# Altium PCB Carte_alim.PCBDOC
Units mm, origin at the board's own origin, x right, y up, seen from the top; angles counter-clockwise.
Board outline 299.72 x 199.9 mm, 2 copper layers (Top Layer, Bottom Layer); 50 components, 15 nets, 112 pads, 0 vias.
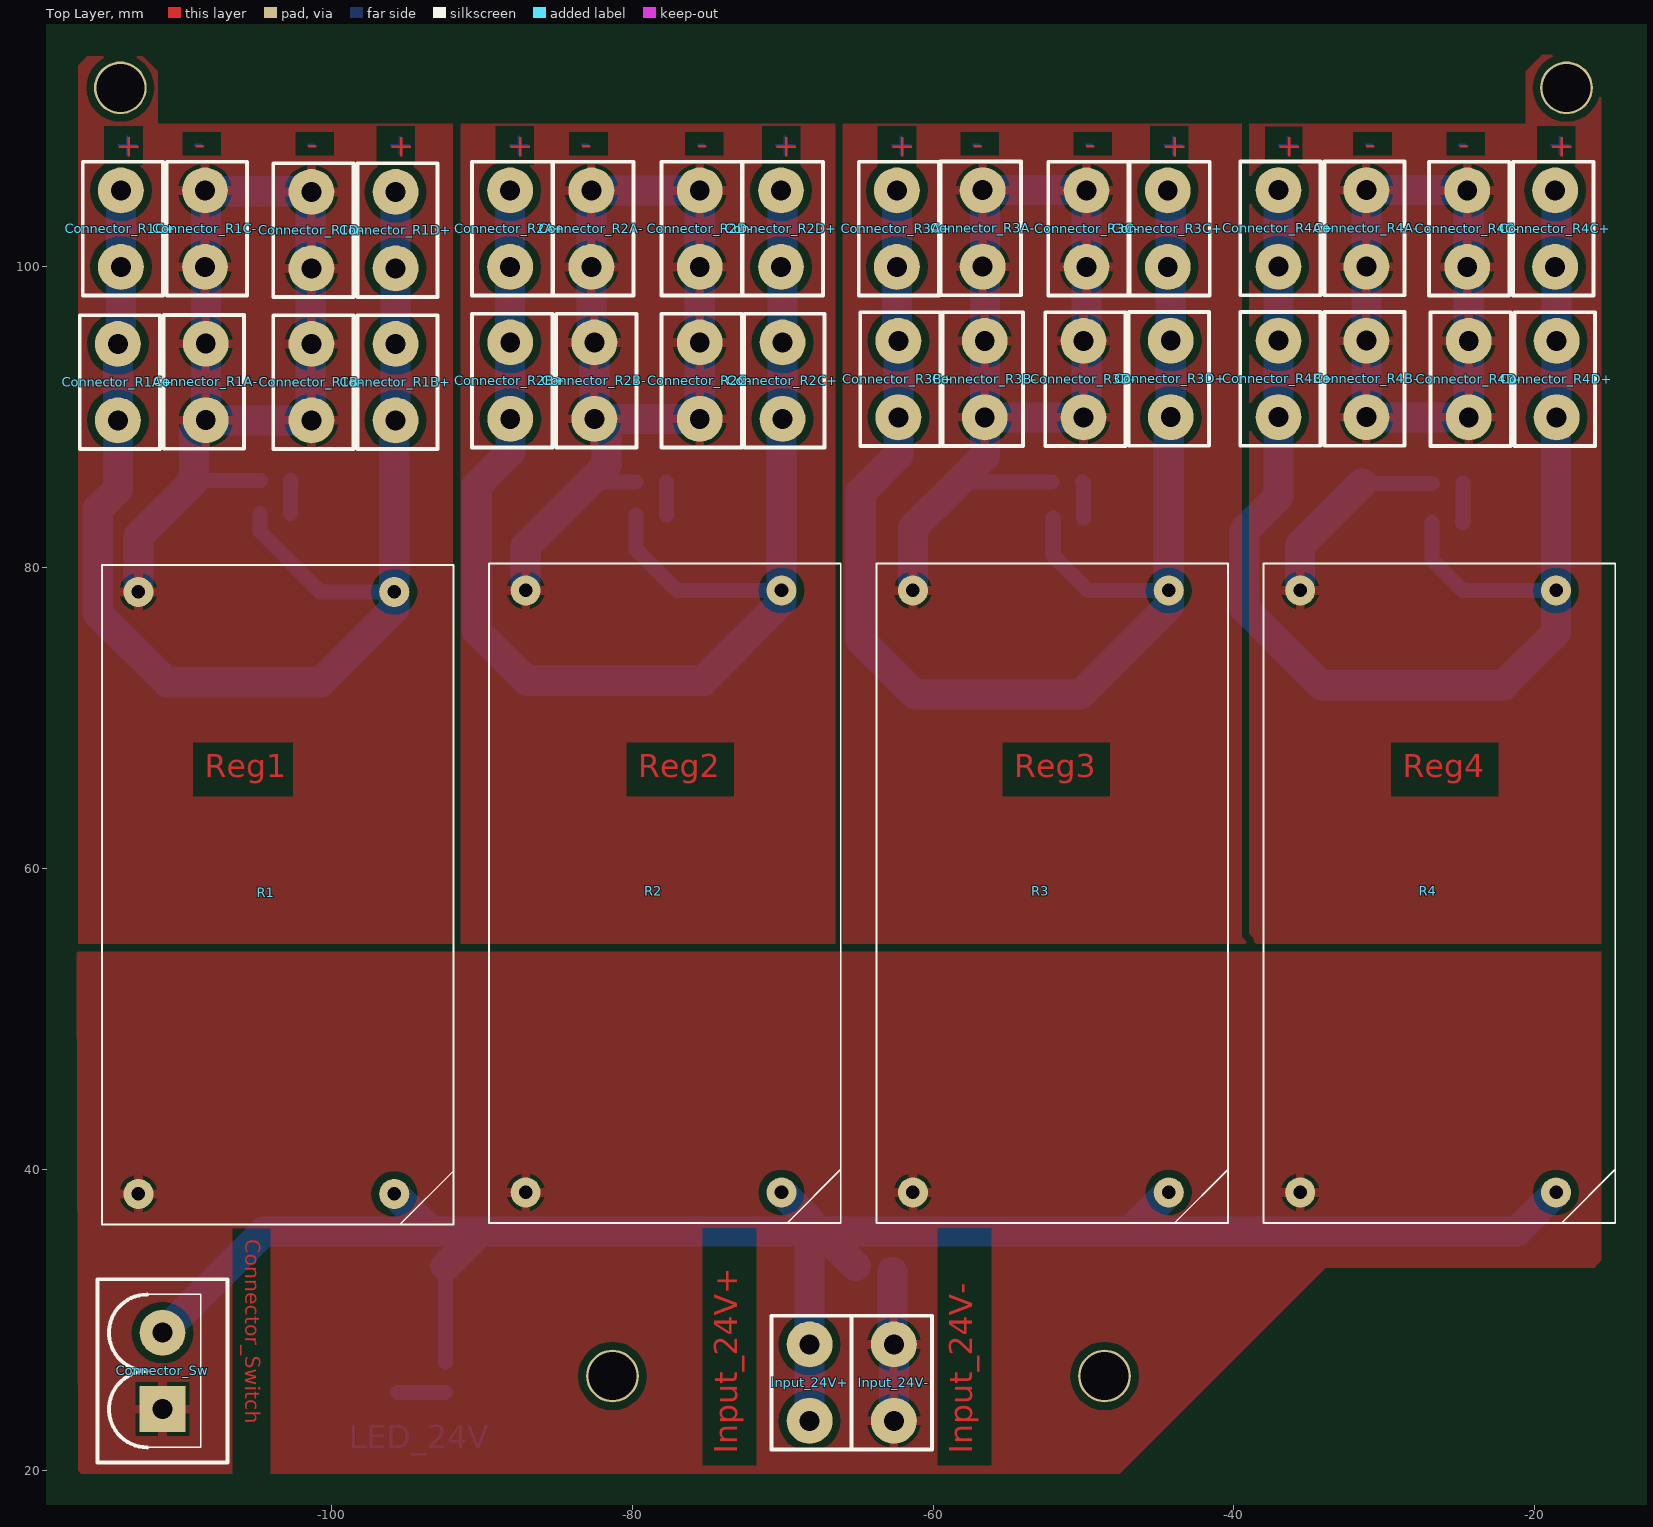
[diagram p0: Top Layer view]
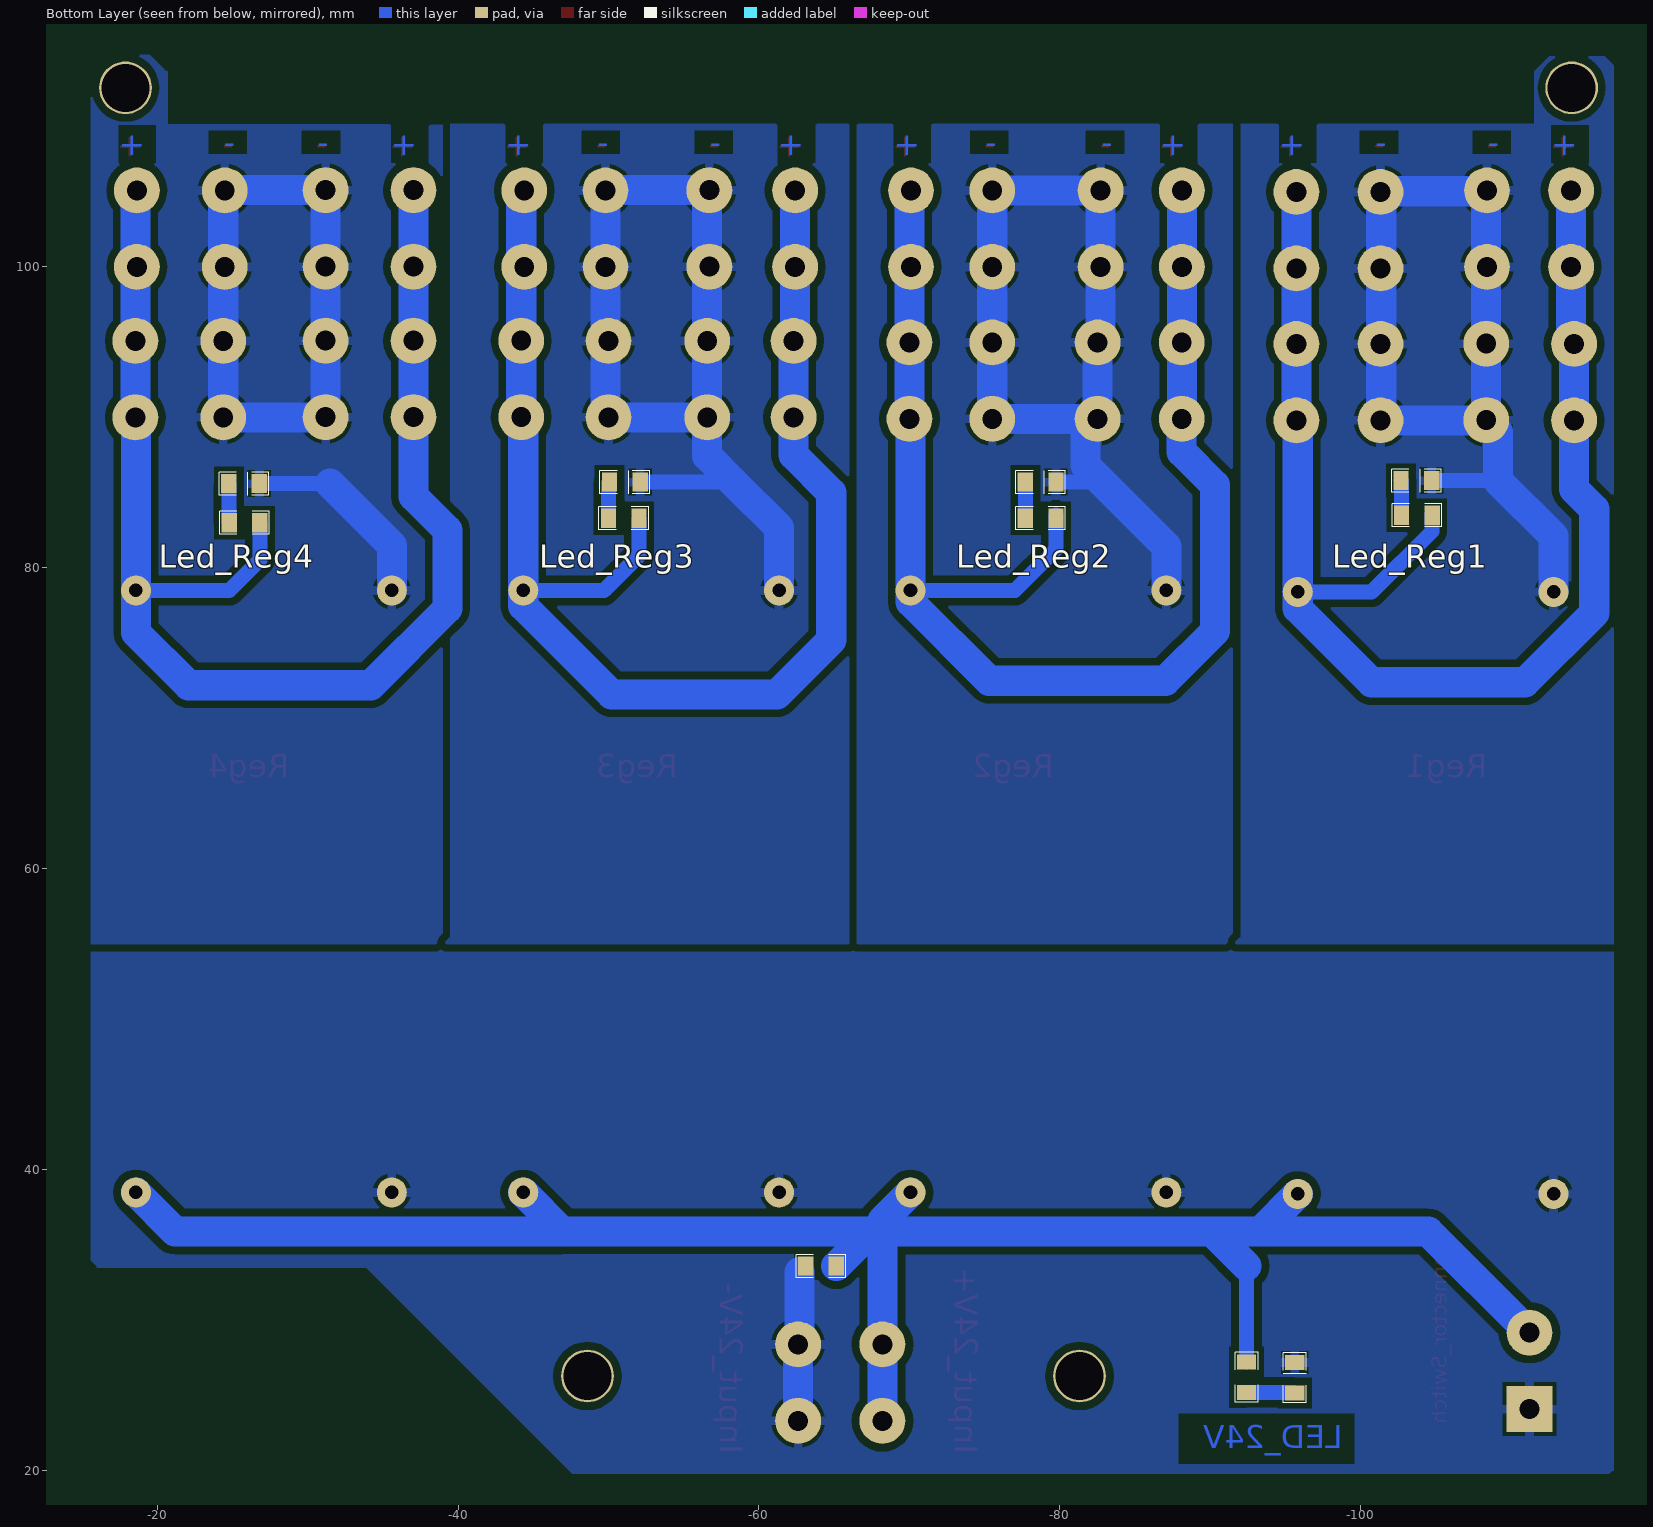
[diagram p1: Bottom Layer view, seen from below]

## Layer stack, top to bottom
Top Solder: solder mask 0.0102, Solder Resist, Dk 3.5
Top Layer: signal copper 0.0356
Dielectric1: dielectric 0.32, FR-4, Dk 4.8
Bottom Layer: signal copper 0.0356
Bottom Solder: solder mask 0.0102, Solder Resist, Dk 3.5

## Board outline
-141.655,-46.39 158.065,-46.39 158.065,153.508 -141.655,153.508

## Design rules (kind name [scope] priority, off if disabled: settings)
Clearance Clearance_bottom_polygon [OnLayer('Bottom Layer') Or OnLayer('Multi-Layer') vs OnLayer('Bottom Layer')  And  InPoly] p1: gap=0.508
Clearance Clearance_top_polygon [OnLayer('Top Layer')  Or OnLayer('Multi-Layer') vs OnLayer('Top Layer') And InPoly] p2: gap=0.508
Clearance Clearance_bottom [OnLayer('Bottom Layer') Or OnLayer('Multi-Layer') vs OnLayer('Bottom Layer')  And Not InPoly] p3: gap=0.203
Clearance Clearance_top [OnLayer('Top Layer')  Or OnLayer('Multi-Layer') vs OnLayer('Top Layer') And Not InPoly] p4: gap=0.203
Clearance Clearance_pad_to_pad [OnLayer('Multi-Layer') vs OnLayer('Multi-Layer')] p5: gap=0.254
ComponentClearance ComponentClearance_bottom [OnLayer('Bottom Overlay') vs OnLayer('Bottom Overlay')] p1: gap=0 collisioncheckmode=3 verticalgap=0.254 showdistances=FALSE
ComponentClearance ComponentClearance_top [OnLayer('Top Overlay') vs OnLayer('Top Overlay')] p2: gap=0 collisioncheckmode=3 verticalgap=0.254 showdistances=FALSE
FabricationTestPointUsage TestPointUsage [All] p1: valid=0 allowmultiple=FALSE
FabricationTestpoint Testpoint [All] p1: side=3 testpointundercomponent=TRUE minsize=1.016 maxsize=2.54 preferedsize=1.524 minholesize=0 maxholesize=1.016 preferedholesize=0.813 testpointgrid=0.025 allowsidetop=TRUE allowsidebottom=TRUE usegrid=TRUE gridtolerance=0
HoleSize [All] p1: absolutevalues=TRUE maxlimit=25.4 minlimit=0.406 maxpercent=80.000 minpercent=20.000
MinimumAnnularRing [PadXSize_AllLayers = PadYSize_AllLayers] p1: minimumring=0.254
PermittedLayers [All] p1: toplayerpermitted=TRUE bottomlayerpermitted=TRUE
PolygonConnect [All] p1: connectstyle=Relief reliefconductorwidth=0.61 reliefentries=4 polygonreliefangle="90 Angle" airgapwidth=0.254
RoutingVias [All] p1: holewidth=0.406 width=0.813 viastyle="Through Hole" minholewidth=0.4 minwidth=0.8 maxholewidth=0.6 maxwidth=10
SMDToPlane [All] p1: distance=0
SolderMaskExpansion [All] p1: expansion=0.102
ViasUnderSMD [All] p1: allowed=FALSE
Width Width_botom_top [OnLayer('Bottom Layer') or OnLayer('Top Layer')] p1: maxlimit=254 minlimit=0.254 preferedwidth=0.813 minimp=50.000000 maximp=50.000000 favimp=50.000000
26 further rules are at their usual default settings.

## Classes and differential pairs
component class Carte_alim: R1 R2 R5

## Components (designator, comment, footprint, x,y, rotation, side; value= is the part's Value field where it differs from the comment)
Connector_R1A+ "Connector_Cosse" Connector_Cosse -114.164,89.8 r180 top
Connector_R1A- "Connector_Cosse" Connector_Cosse -108.322,94.9 r0 top
Connector_R1B+ "Connector_Cosse" Connector_Cosse -95.712,89.8 r180 top
Connector_R1B- "Connector_Cosse" Connector_Cosse -101.3,89.8 r180 top
Connector_R1C+ "Connector_Cosse" Connector_Cosse -113.964,100 r180 top
Connector_R1C- "Connector_Cosse" Connector_Cosse -108.376,100 r180 top
Connector_R1D+ "Connector_Cosse" Connector_Cosse -95.712,99.9 r180 top
Connector_R1D- "Connector_Cosse" Connector_Cosse -101.3,99.9 r180 top
Connector_R2A+ "Connector_Cosse" Connector_Cosse -88.1,100 r180 top
Connector_R2A- "Connector_Cosse" Connector_Cosse -82.7,100 r180 top
Connector_R2B+ "Connector_Cosse" Connector_Cosse -88.088,89.9 r180 top
Connector_R2B- "Connector_Cosse" Connector_Cosse -82.5,89.9 r180 top
Connector_R2C+ "Connector_Cosse" Connector_Cosse -70,89.9 r180 top
Connector_R2C- "Connector_Cosse" Connector_Cosse -75.5,89.9 r180 top
Connector_R2D+ "Connector_Cosse" Connector_Cosse -70.1,100 r180 top
Connector_R2D- "Connector_Cosse" Connector_Cosse -75.5,100 r180 top
Connector_R3A+ "Connector_Cosse" Connector_Cosse -62.4,100 r180 top
Connector_R3A- "Connector_Cosse" Connector_Cosse -56.7,105.1 r0 top
Connector_R3B+ "Connector_Cosse" Connector_Cosse -62.3,90 r180 top
Connector_R3B- "Connector_Cosse" Connector_Cosse -56.558,95.08 r0 top
Connector_R3C+ "Connector_Cosse" Connector_Cosse -44.4,100 r180 top
Connector_R3C- "Connector_Cosse" Connector_Cosse -49.8,100 r180 top
Connector_R3D+ "Connector_Cosse" Connector_Cosse -44.2,95.1 r0 top
Connector_R3D- "Connector_Cosse" Connector_Cosse -50,90 r180 top
Connector_R4A+ "Connector_Cosse" Connector_Cosse -37.042,100.02 r180 top
Connector_R4A- "Connector_Cosse" Connector_Cosse -31.2,105.1 r0 top
Connector_R4B+ "Connector_Cosse" Connector_Cosse -37.042,90.02 r180 top
Connector_R4B- "Connector_Cosse" Connector_Cosse -31.2,95.1 r0 top
Connector_R4C+ "Connector_Cosse" Connector_Cosse -18.658,105.08 r0 top
Connector_R4C- "Connector_Cosse" Connector_Cosse -24.5,100 r180 top
Connector_R4D+ "Connector_Cosse" Connector_Cosse -18.558,95.08 r0 top
Connector_R4D- "Connector_Cosse" Connector_Cosse -24.4,90 r180 top
Connector_Sw "comment" AMP_2 -111.2,24.1 r90 top
Decouplage_input_reg "CAP" 0805 -63.1,33.6 r180 bottom
Input_24V+ "Connector_Cosse" Connector_Cosse -68.2,23.32 r180 top
Input_24V- "Connector_Cosse" Connector_Cosse -62.6,28.4 r0 top
LED_REG1 "comment" LED0805 -104.7,85.8 r0 bottom
LED_REG2 "comment" LED0805 -79.732,85.7 r0 bottom
LED_REG3 "comment" LED0805 -52.1,85.7 r0 bottom
LED_REG4 "comment" LED0805 -26.8,85.6 r0 bottom
LED_V24 "Bleue" LED0805 -95.6,27.2 r270 bottom
R1 "Régulateur" Régulateur -95.8,38.4 r180 top
R2 "Régulateur" Régulateur -70.067,38.5 r180 top
R3 "Régulateur" Régulateur -44.333,38.5 r180 top
R4 "Régulateur" Régulateur -18.6,38.5 r180 top
RES_24V "" 0805 -92.4,25.2 r90 bottom
RES_REG1 "RES" 0805 -102.7,83.5 r180 bottom
RES_REG2 "RES" 0805 -77.7,83.3 r180 bottom
RES_REG3 "RES" 0805 -50,83.3 r180 bottom
RES_REG4 "RES" 0805 -24.8,83 r180 bottom

## Footprints (in the part's own frame and the unit in brackets; to place one, negate y for a bottom-side part, rotate by r counter-clockwise, add the part's x,y. Pads: shape width x height; smd on the part's side, far side on the other; paste and mask are expansions set on the pad)
0805 [mil]
  rect 40x50 smd: 1(0,0) 2(80,0)
  silkscreen extent -25,-30 105,30
AMP_2 [mil]
  rect 120x120 hole 52: 1(0,0)
  round 120 hole 52: 2(200,0)
  silkscreen extent -140,-170 340,170
Connector_Cosse [mil]
  round 120 hole 52.01: 1(0,0) 1(0,-200)
  silkscreen extent -110,-275 100,75
LED0805 [mil]
  rect 40x50 smd: A(80,0) K(0,0)
  silkscreen extent -25,-30 105,30
Régulateur [mm]
  round 2 hole 0.9: 1(0,0) 2(17,0) 3(17,-40) 4(0,-40)
  silkscreen extent -3.94,-41.78 19.43,2.03

## Part data
Connector_Sw: library part POWER2, "connecteur alim 2 pôles"
Decouplage_input_reg: "capacité non polarisée"
LED_REG1 LED_REG2 LED_REG3 LED_REG4 LED_V24: library part LED, "LED 5mm/3mm/CMS"
R1 R2 R3 R4: "Régulateur de tension"
RES_24V: library part RES, "resistance"
RES_REG1 RES_REG2 RES_REG3 RES_REG4: "resistance"

## Free pads (board coordinates)
  round 3.5 hole 3.2: 0(-114,111.9) 0(-81.3,26.3) 0(-48.6,26.3) 0(-17.9,111.9)

## Nets (pads, with @x,y where several pads share a name; then routed paths per layer and width w, separated by ;. In a path a pad name is that pad's centre, name@x,y a point inside that pad or via, vN(x,y) a via of type N, cw(c..) or ccw(c..) an arc to the next point about the centre after c; other vN are vias at no path point)
24V+: Connector_Sw.2 Decouplage_input_reg.2 Input_24V+.1 R1.1 R2.1 R3.1 R4.1 RES_24V.2 | length 132.5
  Bottom Layer w1: RES_24V.2 -92.4,33.6
  Bottom Layer w2: Connector_Sw.2 -104.48,35.9 -93.3,35.9 ; R1.1 -93.3,35.9 ; -92.4,33.6 -90.1,35.9 ; R2.1 -68.2,36.633 -68.2,35.9 ; Input_24V+.1@-68.2,23.32 -68.2,28.4 -68.2,35.9 ; Decouplage_input_reg.2 -67.432,35.9 ; R3.1 -46.933,35.9 ; R4.1 -21.2,35.9 -46.933,35.9 ; -93.3,35.9 -90.1,35.9 ; -90.1,35.9 -68.2,35.9 ; -68.2,35.9 -67.432,35.9 ; -67.432,35.9 -46.933,35.9
24V-: Connector_Sw.1 Decouplage_input_reg.1 Input_24V-.1 LED_V24.K R1.2 R2.2 R3.2 R4.2 | length 10.5
  Bottom Layer w1: Decouplage_input_reg.1 Decouplage_input_reg.1@-62.7,33.2
  Bottom Layer w2: Decouplage_input_reg.1@-62.7,33.2 -62.7,28.5 -62.6,28.4 Input_24V-.1@-62.6,23.32
NetLED_REG1_A: LED_REG1.A RES_REG1.1 | length 2.2
  Bottom Layer w1: RES_REG1.1@-102.7,83.6 -102.7,85.768 LED_REG1.A
NetLED_REG2_A: LED_REG2.A RES_REG2.1 | length 2.2
  Bottom Layer w1: RES_REG2.1@-77.7,83.5 LED_REG2.A
NetLED_REG3_A: LED_REG3.A RES_REG3.1 | length 2.4
  Bottom Layer w1: LED_REG3.A -50,85.632 RES_REG3.1
NetLED_REG4_A: LED_REG4.A RES_REG4.1 | length 2.6
  Bottom Layer w1: RES_REG4.1 -24.768,83.032 LED_REG4.A
NetLED_V24_A: LED_V24.A RES_24V.1 | length 3.2
  Bottom Layer w1: LED_V24.A@-95.568,25.2 RES_24V.1
R1+: Connector_R1A+.1 Connector_R1B+.1 Connector_R1C+.1 Connector_R1D+.1 R1.4 RES_REG1.2 | length 91.9
  Bottom Layer w1: RES_REG1.2@-104.732,83.6 -104.732,82.432 -100.7,78.4 R1.4
  Bottom Layer w2: Connector_R1C+.1@-113.964,105.08 -113.964,100 -113.964,95.08 -114.164,94.88 -114.164,89.8 -114.164,85.236 -115.5,83.9 -115.5,77 -110.9,72.4 -100.7,72.4 -95.8,77.3 R1.4 Connector_R1B+.1@-95.8,89.712 ; Connector_R1D+.1@-95.712,104.98 -95.712,99.9 -95.712,94.88 -95.712,89.8 Connector_R1B+.1@-95.6,89.688
R1-: Connector_R1A-.1 Connector_R1B-.1 Connector_R1C-.1 Connector_R1D-.1 LED_REG1.K R1.3 | length 62.2
  Bottom Layer w1: -109.1,85.8 LED_REG1.K
  Bottom Layer w2: R1.3 -112.8,82.1 -109.1,85.8 -109.1,89.042 -108.322,89.82 -108.322,94.9 Connector_R1C-.1@-108.322,99.946 ; Connector_R1C-.1@-108.376,100 Connector_R1C-.1@-108.322,99.946 ; Connector_R1A-.1@-108.302,89.8 Connector_R1B-.1@-101.3,89.8 ; Connector_R1B-.1@-101.346,89.846 -101.346,94.88 -101.3,94.88 -101.32,94.9 -101.346,94.9 Connector_R1D-.1@-101.346,99.9 ; Connector_R1D-.1@-101.3,99.9 Connector_R1D-.1@-101.346,99.9 ; Connector_R1C-.1@-108.322,99.946 -108.322,105.026 -101.346,105.026 Connector_R1D-.1@-101.346,99.9
R2+: Connector_R2A+.1 Connector_R2B+.1 Connector_R2C+.1 Connector_R2D+.1 R2.4 RES_REG2.2 | length 94.2
  Bottom Layer w1: RES_REG2.2@-79.732,83.5 -79.732,81.232 -77,78.5 R2.4
  Bottom Layer w2: Connector_R2B+.1@-88.1,89.912 -88.1,100 Connector_R2A+.1@-88.1,105.08 ; Connector_R2B+.1@-88.088,89.9 -88.088,87.712 -90.3,85.5 -90.3,75.8 -87,72.5 -75.3,72.5 -70.067,77.733 R2.4 Connector_R2C+.1@-70.067,89.833 ; Connector_R2C+.1@-70,89.9 -70,94.98 Connector_R2D+.1@-70,104.98
R2-: Connector_R2A-.1 Connector_R2B-.1 Connector_R2C-.1 Connector_R2D-.1 LED_REG2.K R2.3 | length 61.4
  Bottom Layer w1: -82.8,85.7 LED_REG2.K
  Bottom Layer w2: R2.3 -87.067,81.433 -82.8,85.7 -81.7,86.8 -81.7,89.1 Connector_R2B-.1@-82.5,89.9 ; Connector_R2B-.1@-82.7,95.18 -82.7,100 -82.7,105.08 -75.5,105.08 -75.5,100 -75.5,94.98 -75.5,89.9 Connector_R2B-.1@-82.5,89.9 ; Connector_R2B-.1@-82.5,94.98 Connector_R2B-.1@-82.5,89.9
R4+: Connector_R4A+.1 Connector_R4B+.1 Connector_R4C+.1 Connector_R4D+.1 R4.4 RES_REG4.2 | length 94.3
  Bottom Layer w1: RES_REG4.2 -26.832,80.532 -24.8,78.5 R4.4
  Bottom Layer w2: Connector_R4A+.1@-37.042,105.1 -37.042,100.02 -37.042,95.1 -37.042,90.02 -37.042,84.758 -39.3,82.5 -39.3,77.3 -34.2,72.2 -22.1,72.2 -18.6,75.7 R4.4 Connector_R4D+.1@-18.6,89.958 ; Connector_R4C+.1@-18.658,105.08 Connector_R4C+.1@-18.558,104.98 ; Connector_R4D+.1@-18.558,90 -18.558,95.08 Connector_R4C+.1@-18.558,105.38
R4-: Connector_R4A-.1 Connector_R4B-.1 Connector_R4C-.1 Connector_R4D-.1 LED_REG4.K R4.3 | length 57.1
  Bottom Layer w1: -31.5,85.6 LED_REG4.K
  Bottom Layer w2: R4.3 -35.6,81.5 -31.5,85.6 ; Connector_R4A-.1@-31.2,105.1 -31.2,100.02 -31.2,95.1 -31.2,90.02 -31.18,90 -24.4,90 -24.4,95.08 -24.4,104.98 -24.5,105.08 -24.52,105.1 Connector_R4A-.1@-31.1,105.1
REG3+: Connector_R3A+.1 Connector_R3B+.1 Connector_R3C+.1 Connector_R3D+.1 R3.4 RES_REG3.2 | length 94.2
  Bottom Layer w1: RES_REG3.2 -52.032,80.832 -49.7,78.5 R3.4 ; Connector_R3D+.1@-44.333,89.887 Connector_R3D+.1@-44.2,90.02
  Bottom Layer w2: Connector_R3A+.1@-62.4,105.08 -62.4,100 -62.4,95.18 -62.3,95.08 -62.3,90 -62.3,87.5 -64.8,85 -64.8,75.2 -61.2,71.6 -50.2,71.6 -44.333,77.467 R3.4 Connector_R3D+.1@-44.333,89.887 ; Connector_R3C+.1@-44.4,105.08 -44.2,104.88 -44.2,95.1 Connector_R3D+.1@-44.2,90.02
REG3-: Connector_R3A-.1 Connector_R3B-.1 Connector_R3C-.1 Connector_R3D-.1 LED_REG3.K R3.3 | length 63.3
  Bottom Layer w1: -58.3,85.7 LED_REG3.K
  Bottom Layer w2: R3.3 -61.333,82.667 -58.3,85.7 -56.558,87.442 Connector_R3B-.1@-56.558,90 ; Connector_R3A-.1@-56.7,104.9 -56.558,104.758 -56.558,95.08 Connector_R3B-.1@-56.558,90 ; Connector_R3A-.1@-56.7,105.1 -49.82,105.1 -49.8,105.08 -49.8,100 -49.8,90.2 -50,90 Connector_R3B-.1@-56.558,90

## Polygon pours and split planes (outlines as drawn)
24V- on Bottom Layer "Mechanical 1-No Net" (solid, pour order 22): -116.8,55 -15.6,55 -15.6,34 -16,33.6 -16,33.5 -33.9,33.5 -34,33.4 -47.6,19.8 -116.5,19.8 -116.7,20 -116.8,20
R4- on Bottom Layer "Mechanical 1-No Net" (solid, pour order 20): -39.5,109.459 -39.5,55.5 -39.5,55 -15.6,55 -15.6,113 -16.7,114.1 -19.5,114.1 -20.6,113 -20.7,113 -20.7,109.6 -20.7,109.5
REG3- on Bottom Layer "Mechanical 1-No Net" (solid, pour order 18): -66.6,109.5 -66.5,109.4 -66.5,55 -39,55 -39.5,55.5 -39.5,74.5 -39.5,109.5
R2- on Bottom Layer "Mechanical 1-No Net" (solid, pour order 16): -91.666,55 -92,55.334 -92,109.5 -66.6,109.5 -66.5,109.6 -66.5,100.7 -66.5,55
R1- on Bottom Layer "Mechanical 1-No Net" (solid, pour order 14): -112.5,114 -111.5,113 -111.5,109.5 -92,109.5 -92,102 -92,55.5 -91.5,55 -116.8,55 -116.8,113.4 -116.2,114 -116,114
R4- on Top Layer "Mechanical 1-No Net" (solid, pour order 36): -39.5,109.5 -39.5,55.334 -39.184,55.018 -38.666,54.5 -15.6,54.5 -15.6,113 -16.7,114.1 -19.5,114.1 -20.6,113 -20.6,109.5
REG3- on Top Layer "Mechanical 1-No Net" (solid, pour order 34): -66.5,109.5 -66.5,55.018 -39.018,55.018 -39,55 -39.5,55.5 -39.5,109.5
R2- on Top Layer "Mechanical 1-No Net" (solid, pour order 32): -91.9,109.5 -91.9,55.018 -91.882,55 -66.5,55 -66.5,109.5
R1- on Top Layer "Mechanical 1-No Net" (solid, pour order 30): -116.2,114 -116.8,113.4 -116.8,54.51 -116.81,54.5 -116.71,54.4 -91.9,54.4 -91.9,109.5 -92.3,109.5 -111.5,109.5 -111.5,113 -112.5,114 -116.2,114
24V- on Top Layer "Mechanical 1-No Net" (solid, pour order 24): -116.9,54.5 -15.6,54.5 -15.6,34 -16,33.6 -16,33.5 -33.9,33.5 -47.6,19.8 -116.6,19.8 -116.8,20

## Other copper
Top Layer:
  text "-" at -109.1,107.416 h1.52
  text "-" at -101.6,107.416 h1.52
  text "-" at -83.4,107.416 h1.52
  text "-" at -75.7,107.416 h1.52
  text "-" at -57.4,107.416 h1.52
  text "-" at -49.9,107.416 h1.52
  text "-" at -31.3,107.416 h1.52
  text "-" at -25.1,107.416 h1.52
  text "+" at -114.3,107.308 h1.52
  text "+" at -96.2,107.308 h1.52
  text "+" at -88.3,107.308 h1.52
  text "+" at -70.6,107.308 h1.52
  text "+" at -62.9,107.308 h1.52
  text "+" at -44.8,107.308 h1.52
  text "+" at -37.2,107.308 h1.52
  text "+" at -19.1,107.308 h1.52
  text "Reg1" at -108.4,66.1 h1.52
  text "Reg2" at -79.6,66.1 h1.52
  text "Reg3" at -54.6,66.1 h1.52
  text "Reg4" at -28.8,66.1 h1.52
  text "Connector_Switch" at -105.7,35.4 h1 r270
  text "Input_24V+" at -73,21.127 h1.52 r90
  text "Input_24V-" at -57.4,21.127 h1.52 r90
Bottom Layer:
  text "-" at -109.2,107.516 h1.52
  text "-" at -101.7,107.516 h1.52
  text "-" at -83.5,107.516 h1.52
  text "-" at -75.8,107.516 h1.52
  text "-" at -57.5,107.516 h1.52
  text "-" at -50,107.516 h1.52
  text "-" at -31.4,107.516 h1.52
  text "-" at -25.2,107.516 h1.52
  text "+" at -114.4,107.408 h1.52
  text "+" at -96.3,107.408 h1.52
  text "+" at -88.4,107.408 h1.52
  text "+" at -70.7,107.408 h1.52
  text "+" at -63,107.408 h1.52
  text "+" at -44.9,107.408 h1.52
  text "+" at -37.3,107.408 h1.52
  text "+" at -19.2,107.408 h1.52
  text "LED_24V" at -98.8,21.5 h1.52

## Silkscreen, mask and mechanical layers (free items; w line width, h text height)
Bottom Overlay:
  text "Led_Reg1" at -98.1,80 h1.52
  text "Led_Reg2" at -73.1,80 h1.52
  text "Led_Reg3" at -45.4,80 h1.52
  text "Led_Reg4" at -20.1,80 h1.52
Mechanical 1:
  lines w0.254: -116.8,20 -116.6,19.8 -59.5,19.8 -47.6,19.8 -33.9,33.5 -16,33.5 -15.6,33.9 -15.6,56.375 -15.6,92.725 -15.6,111.5 -15.6,113 -16.7,114.1 -19.5,114.1 -20.5,113.1 -20.7,112.9 -24,109.6 -107.9,109.6 -108,109.5 -111.5,113 -112.5,114 -116.1,114 -116.8,113.3 -116.8,113 -116.8,107.5 -116.8,20